# EAGLE board RFBoardLayoutGen0_v02.1 (EAGLE 7.2.0)
AUTHOR: Kirchschlager Raimund
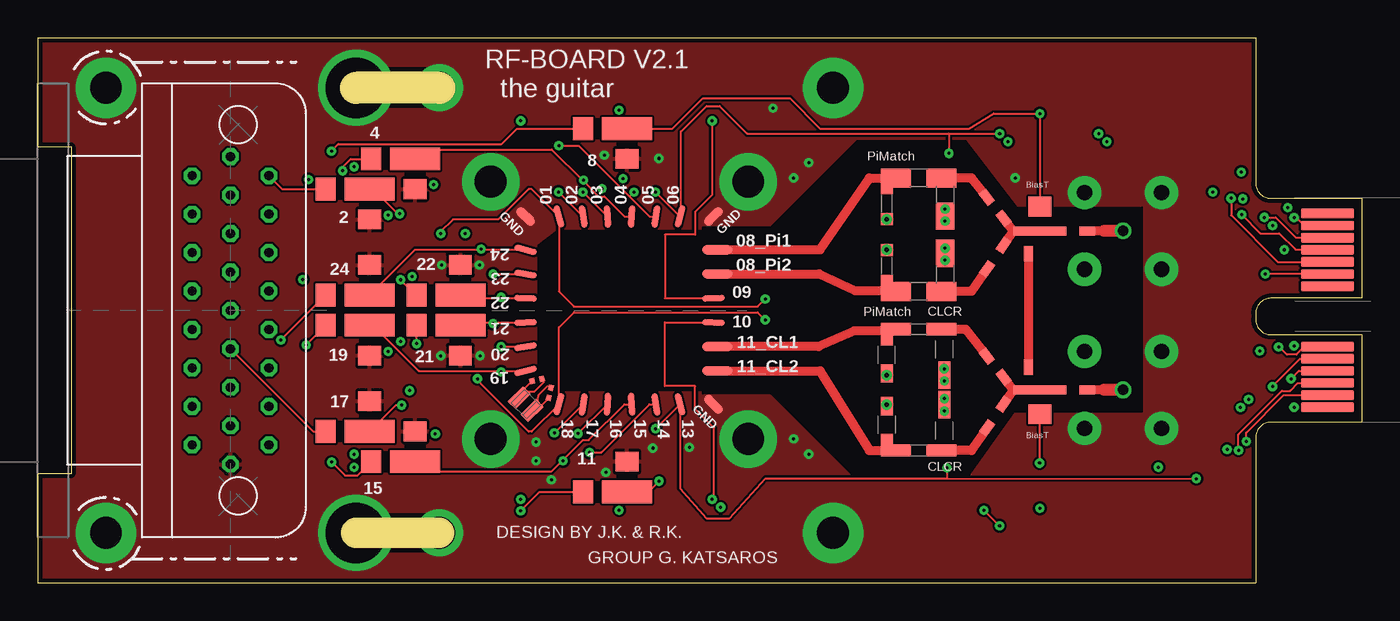
[diagram p0: board, top side]
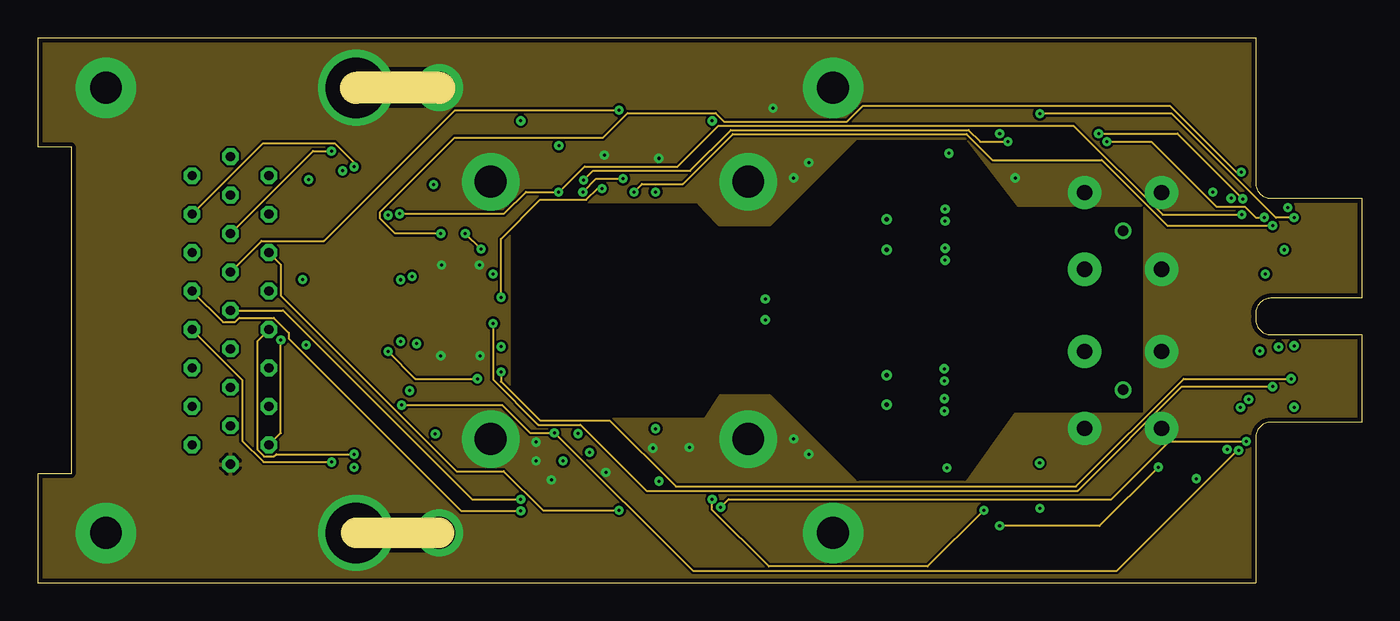
[diagram p1: board, inner layer Route2]
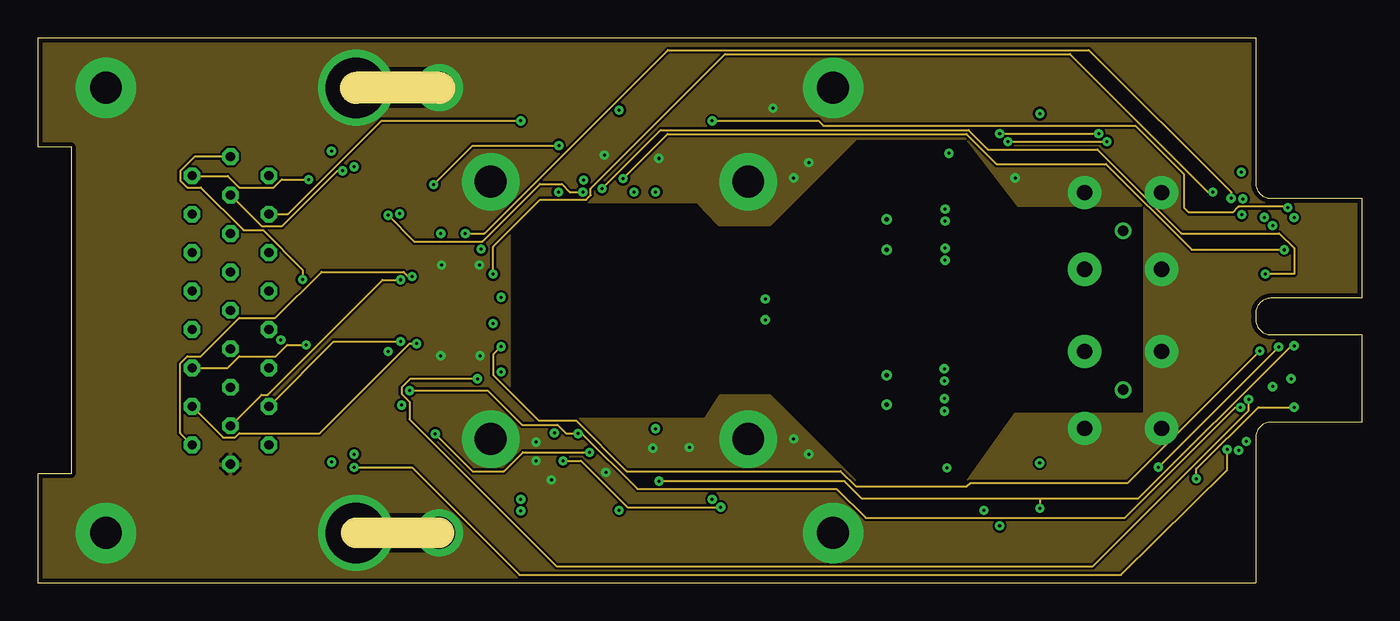
[diagram p2: board, inner layer Route15]
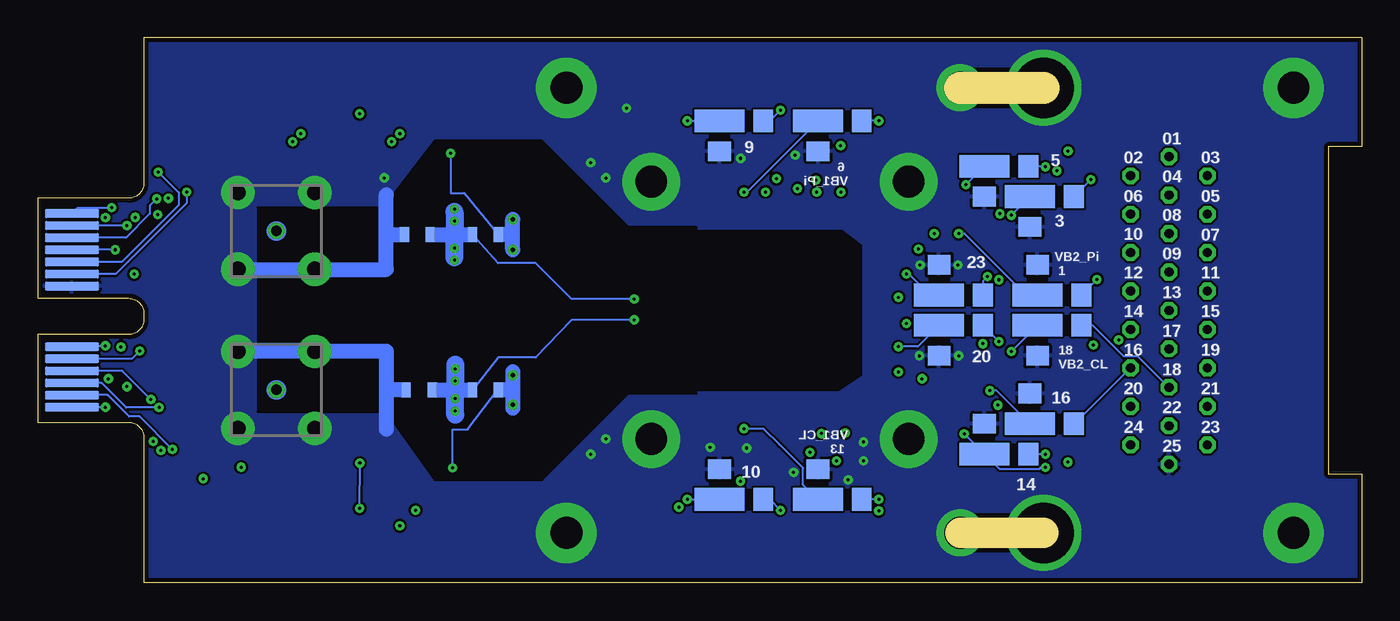
[diagram p3: board, bottom side, seen from below]

Size 87.4 x 36 mm. Coordinates in mm from the lower left corner, seen from the top.
Outline: 26.5,3.3 21,3.3
Outline: 26.5,32.7 21,32.7
Outline: 0,36 0,28.8 2.2,28.8 2.2,7.2 0,7.2 0,0 80.4,0 80.4,9.6 arc-90 81.4,10.6 87.4,10.6 87.4,16.4 81.4,16.4 arc-90 80.4,17.4 80.4,17.8 arc-90 81.4,18.8 87.4,18.8 87.4,25.4 81.4,25.4 arc-90 80.4,26.4 80.4,36 0,36
Copper layers (1+2*15+16): Top 0.035mm / dielectric 0.38mm / Route2 0.035mm / dielectric 0.71mm / Route15 0.035mm / dielectric 0.38mm / Bottom 0.035mm
Design rules "PCB-POOL HighSpec_ML4+ *": minimum track width 0.125mm, minimum drill 0.2mm, track to track 0.125mm, track to pad 0.125mm, pad to pad 0.125mm, via to via 0.125mm, smd to smd 0.125mm, copper to edge 0.3mm, drill to drill 0.2mm, minimum pad ring 10mil, minimum via ring 8mil, stop-mask expansion 0.075mm, vias tented up to drill 0.2mm, thermal gap 0.2mm
Net classes: 0 GND: clearance 0.15 mm; 1 RF: clearance 0.3 mm

## Footprints (pad centres in the part's own frame; a part is rotated, then mirrored left to right if it is on the bottom)
24DC+4RF/400MU-PADS/10.0X10.0_V1.2 = smd 0 x 0: BASE 0,0 | smd 1.5 x 0.6 rotated 315: P$1 -6.2,6.2; P$6 6.2,-6.2 | smd 1.5 x 0.4 rotated 267: P$2 0.8,6.2 | smd 1.5 x 0.6 rotated 45: P$3 6.2,6.2 | smd 1.5 x 0.4 rotated 93: P$4 0.8,-6.2; P$40 -0.8,6.2 | smd 0 x 0 rotated 45: P$5 -6.2,-6.2 | smd 1.5 x 0.4 rotated 345: P$26 -6.2,4 | smd 1.5 x 0.4 rotated 351: P$27 -6.2,2.4 | smd 1.5 x 0.4 rotated 357: P$28 -6.2,0.8; P$35 6.2,-0.8 | smd 1.5 x 0.4 rotated 3: P$29 -6.2,-0.8; P$34 6.2,0.8 | smd 1.5 x 0.4 rotated 9: P$30 -6.2,-2.4 | smd 1.5 x 0.4 rotated 15: P$31 -6.2,-4 | smd 2 x 0.6: P$32 6.45,4; P$33 6.45,2.4; P$36 6.45,-2.4; P$37 6.45,-4 | smd 1.5 x 0.4 rotated 105: P$38 -4,6.2; P$49 4,-6.2 | smd 1.5 x 0.4 rotated 99: P$39 -2.4,6.2; P$48 2.4,-6.2 | smd 1.5 x 0.4 rotated 81: P$42 2.4,6.2; P$45 -2.4,-6.2 | smd 1.5 x 0.4 rotated 75: P$43 4,6.2; P$44 -4,-6.2 | smd 1.5 x 0.4 rotated 87: P$46 -0.8,-6.2
25_SOCKET_M83513/13-D = drill 0.6 octagon: 01 10.16,0; 02 8.89,2.54; 03 6.35,2.54; 04 3.81,2.54; 05 2.54,0; 06 1.27,2.54; 07 0,0; 08 -1.27,2.54; 09 -2.54,0; 10 -3.81,2.54; 11 -6.35,2.54; 12 -8.89,2.54; 13 -10.16,0; 14 8.89,-2.54; 15 7.62,0; 16 6.35,-2.54; 17 5.08,0; 18 3.81,-2.54; 19 1.27,-2.54; 20 -1.27,-2.54; 21 -3.81,-2.54; 22 -5.08,0; 23 -6.35,-2.54; 24 -7.62,0; 25 -8.89,-2.54
MEC8-113-02-L-D-RA1 = smd 0.6 x 3.5: 129 -6.4,0.15; 130 -5.6,0.15; 131 -4.8,0.15; 132 -4,0.15; 133 -3.2,0.15; 134 -2.4,0.15; 135 -1.6,0.15; 136 2.4,0.15; 137 3.2,0.15; 138 4,0.15; 139 4.8,0.15; 140 5.6,0.15; 141 6.4,0.15 | smd 0.6 x 3.5 bottom: 157 -6.4,0.15; 158 -5.6,0.15; 159 -4.8,0.15; 160 -4,0.15; 161 -3.2,0.15; 162 -2.4,0.15; 163 -1.6,0.15; 168 2.4,0.15; 169 3.2,0.15; 170 4,0.15; 171 4.8,0.15; 172 5.6,0.15; 173 6.4,0.15
LP-FILTER/1_STAGE/OS/V1_01 = smd 1.3 x 1.5: $1 -2.9,0.01 | smd 3.3 x 1.5: $2 0,0.01 | smd 1.5 x 1.3: GND@1 0,-1.99
LP-FILTER/1_STAGE/OS/V1_02 = smd 3.3 x 1.5: $4 0,0.01 | smd 1.3 x 1.5: $6 -2.9,0.01 | smd 1.5 x 1.3: GND@3 0,2.01
PI_MATCH_V01_UP = smd 2 x 1.25: $1 0,0; $3 3,0 | smd 0.8 x 1.4: $2 -0.6,0.375 | smd 1.2 x 1.8: $4 3.25,2.525 | smd 0.8 x 0.8: GND@1 -0.6,2.725
CLCR_V01_DOWN = smd 2 x 0.8: $1 0,0; $3 3,0 | smd 0.8 x 1.4: $2 -0.6,-0.375 | smd 0.8 x 1.2: GND@1 -0.6,-2.925 | smd 0.8 x 1.8: GND@2 3.2,-3.025
LP-FILTER/1_STAGE/OS/V1_03 = smd 3.3 x 1.5 bottom: $4 0,0.01 | smd 1.3 x 1.5 bottom: $6 -2.9,0.01 | smd 1.5 x 1.3 bottom: GND@3 0,2.01
LP-FILTER/1_STAGE/OS/V1_04 = smd 1.3 x 1.5 bottom: $1 -2.9,0.01 | smd 3.3 x 1.5 bottom: $2 0,0.01 | smd 1.5 x 1.3 bottom: GND@1 0,-1.99
SMP_STRAIGHT_V02 = drill 1 pad 2.184: P$3 -2.54,2.54; P$4 2.54,2.54; P$5 2.54,-2.54; P$6 -2.54,-2.54
BIAS_TEE_UP_V01 = smd 1.5 x 1.3: P$1 0,-0.95 | smd 3.5 x 0.6: P$2 0,0.65
BIAS_TEE_DOWN_V01 = smd 1.5 x 1.3: P$1 0,0.95 | smd 3.5 x 0.6: P$2 0,-0.65
SMD1-0,6 = smd 1 x 0.6: 1 0,0
PI_MATCH_V01_DOWN = smd 2 x 1.25: $1 0,0; $3 3,0 | smd 0.8 x 1.4: $2 -0.6,-0.375 | smd 1.2 x 1.8: $4 3.25,-2.525 | smd 0.8 x 0.8: GND@1 -0.6,-2.725
CLCR_V01_UP = smd 2 x 0.8: $1 0,0; $3 3,0 | smd 0.8 x 1.4: $2 -0.6,0.375 | smd 0.8 x 1.2: GND@1 -0.6,2.925 | smd 0.8 x 1.8: GND@2 3.2,3.025
RX-BR_V1 = smd 1.422 x 0.711 rotated 45: P$2 -0.02,-0.87; P$3 -0.87,-0.02 | smd 0.406 x 0.406 rotated 165: P$5 1.23,0.63; P$8 1.08,-0.02 | smd 0.406 x 0.406 rotated 105: P$6 0.63,1.23; P$7 -0.02,1.08

## Placement (x,y rotation side)
E$1  [24DC+4RF/400MU-PADS/10.0X10.0_V1.2]  38.4,18 0 top
E$2  [25_SOCKET_M83513/13-D]  12.71,18 90 top
E$3  [MEC8-113-02-L-D-RA1]  85,18 270 top
E$4  [LP-FILTER/1_STAGE/OS/V1_01]  24.9,28 0 top
E$5  [LP-FILTER/1_STAGE/OS/V1_02]  24.9,8 0 top
E$6  [LP-FILTER/1_STAGE/OS/V1_01]  21.9,26 0 top
E$7  [LP-FILTER/1_STAGE/OS/V1_01]  21.9,17 0 top
E$8  [LP-FILTER/1_STAGE/OS/V1_02]  21.9,19 0 top
E$9  [PI_MATCH_V01_UP]  56.65,19.25 0 top
E$10  [CLCR_V01_DOWN]  56.65,16.75 0 top
E$11  [LP-FILTER/1_STAGE/OS/V1_02]  27.9,19 0 top
E$12  [LP-FILTER/1_STAGE/OS/V1_02]  21.9,10 0 top
E$13  [LP-FILTER/1_STAGE/OS/V1_02]  38.9,6 0 top
E$14  [LP-FILTER/1_STAGE/OS/V1_01]  38.9,30 0 top
E$15  [LP-FILTER/1_STAGE/OS/V1_01]  27.9,17 0 top
E$16  [LP-FILTER/1_STAGE/OS/V1_03]  21.4,19 0 top
E$17  [LP-FILTER/1_STAGE/OS/V1_03]  21.9,10.5 0 top
E$18  [LP-FILTER/1_STAGE/OS/V1_03]  24.9,8.5 0 top
E$19  [LP-FILTER/1_STAGE/OS/V1_03]  27.9,19 0 top
E$20  [LP-FILTER/1_STAGE/OS/V1_04]  24.9,27.5 0 top
E$21  [LP-FILTER/1_STAGE/OS/V1_04]  21.4,17 0 top
E$22  [LP-FILTER/1_STAGE/OS/V1_04]  27.9,17 0 top
E$23  [LP-FILTER/1_STAGE/OS/V1_04]  21.9,25.5 0 top
E$24  [LP-FILTER/1_STAGE/OS/V1_04]  35.9,30.5 0 top
E$25  [LP-FILTER/1_STAGE/OS/V1_04]  42.4,30.5 0 top
E$26  [SMP_STRAIGHT_V02]  71.65,23.25 0 top
E$27  [LP-FILTER/1_STAGE/OS/V1_03]  35.9,5.5 0 top
E$28  [LP-FILTER/1_STAGE/OS/V1_03]  42.4,5.5 0 top
E$29  [BIAS_TEE_UP_V01]  66.15,12.1 0 top
E$30  [BIAS_TEE_DOWN_V01]  66.15,23.9 0 top
E$31  [SMD1-0,6]  65.4,21.75 90 top
E$32  [PI_MATCH_V01_DOWN]  56.65,26.75 0 top
E$33  [SMP_STRAIGHT_V02]  71.65,12.75 0 top
E$34  [SMD1-0,6]  57,23 90 bottom
E$35  [SMD1-0,6]  65.4,14.25 90 top
E$36  [SMD1-0,6]  58.7,23 90 bottom
E$37  [CLCR_V01_UP]  56.65,8.75 0 top
E$38  [SMD1-0,6]  62.65,25.48 128 top
E$39  [SMD1-0,6]  63.75,24.07 128 top
E$40  [SMD1-0,6]  62.65,14.97 128 top
E$41  [SMD1-0,6]  63.75,13.57 128 top
E$42  [SMD1-0,6]  63.75,22.3 235.5 top
E$43  [SMD1-0,6]  62.67,20.74 235.5 top
E$44  [SMD1-0,6]  63.75,11.8 235.5 top
E$45  [SMD1-0,6]  62.67,10.24 235.5 top
E$46  [SMD1-0,6]  57,12.75 90 bottom
E$47  [SMD1-0,6]  58.7,12.75 90 bottom
E$48  [SMD1-0,6]  69.28,12.75 0 top
E$49  [SMD1-0,6]  61.5,23 90 bottom
E$50  [SMD1-0,6]  63.2,23 90 bottom
E$51  [SMD1-0,6]  61.38,12.75 90 bottom
E$52  [SMD1-0,6]  63.08,12.75 90 bottom
E$53  [RX-BR_V1]  32.65,12.25 0 top
E$54  [SMD1-0,6]  69.28,23.25 0 top

## Library data of the parts
E$1 = SampleArea
E$2 = Glenair
E$3 = MEC8-130-02-X-D-RA1
E$4-E$8 E$11-E$25 E$27 E$28 = LPFilter
E$9 E$10 E$32 E$37 = MatchCircuit
E$26 E$33 = RF Connectors
E$29 E$30 = Bias tee
E$31 E$34-E$36 E$38-E$52 E$54 = PADS
E$53 = TempSensors

## Nets
GND1: E$1.P$1 E$1.P$3 E$1.P$6 E$2.13 E$3.163 E$4.GND@1 E$5.GND@3 E$6.GND@1 E$7.GND@1 E$8.GND@3 E$11.GND@3 E$12.GND@3 E$13.GND@3 E$14.GND@1 E$15.GND@1 E$16.GND@3 E$17.GND@3 E$18.GND@3 E$19.GND@3 E$20.GND@1 E$21.GND@1 E$22.GND@1 E$23.GND@1 E$24.GND@1 E$25.GND@1 E$26.P$3 E$26.P$4 E$26.P$5 E$27.GND@3 E$28.GND@3 E$33.P$4 E$33.P$5 E$33.P$6
S$55: E$1.P$49 E$3.173 E$27.$4 E$46.1
S$67: E$2.24 E$11.$6
S$68: E$1.P$29 E$3.137 E$15.$2
S$76: E$2.11 E$15.$1
S$79: E$1.P$27 E$3.162 E$19.$4
S$80: E$2.12 E$19.$6
S$81: E$1.P$30 E$3.169 E$22.$2
S$83: E$2.23 E$22.$1
S$84: E$1.P$26 E$3.133 E$8.$4
S$85: E$2.25 E$8.$6
S$86: E$1.P$38 E$3.161 E$16.$4 E$36.1
S$88: E$2.01 E$16.$6
S$89: E$1.P$31 E$3.138 E$7.$2
S$90: E$2.10 E$7.$1
S$91: E$1.P$44 E$3.170 E$21.$2 E$47.1
S$95: E$2.22 E$21.$1
S$116: E$1.P$39 E$3.132 E$6.$2
S$144: E$2.14 E$6.$1
S$145: E$1.P$40 E$3.160 E$23.$2
S$146: E$2.02 E$23.$1
S$147: E$1.P$2 E$3.131 E$4.$2
S$149: E$2.15 E$4.$1
S$150: E$1.P$42 E$3.158 E$20.$2
S$151: E$2.03 E$20.$1
S$152: E$1.P$45 E$3.139 E$12.$4
S$154: E$2.09 E$12.$6
S$155: E$1.P$46 E$3.171 E$17.$4
S$156: E$2.21 E$17.$6
S$157: E$1.P$4 E$3.140 E$5.$4
S$158: E$2.08 E$5.$6
S$159: E$1.P$48 E$3.172 E$18.$4
S$160: E$2.20 E$18.$6
S$162: E$2.16 E$24.$1
S$168: E$2.17 E$14.$1
S$169: E$1.P$34 E$3.157 E$25.$2
S$170: E$2.05 E$25.$1
S$171: E$2.07 E$27.$6
S$174: E$1.P$28 E$3.134 E$11.$4
S$175: E$2.06 E$13.$6
S$177: E$1.P$35 E$3.136 E$28.$4
S$178: E$2.18 E$28.$6
S$183: E$3.168 E$13.$4 E$29.P$1
S$190: E$3.130 E$14.$2 E$30.P$1
S$199: E$30.P$2
S$211: E$1.P$43 E$3.159 E$24.$2 E$34.1

## Tracks (layer width: path | path; a pad name or v marks a point on that pad's centre or on a via)
GND1  (via drill 0.2, 2.1, 2.1 pad 3.8, 2.1 pad 4, 4)
  Bottom 1: 74.39,15.3 64.4,15.3 64.4,10.16 | 64.4,20.75 64.4,25.62 | 74.4,20.7 64.4,20.7
  other vias: 46.9,26.5 52.5,32.7 29.9,26.5 29.9,9.5 46.9,9.5 4.5,32.7 4.5,3.3 52.5,3.3 21,3.3 21,32.7 26.5,32.7 26.5,3.3 37.4,28.25 26.65,21 29.15,21 26.6,15 29.2,15 40.6,8.9 33.9,6.8 37.5,7.3 32.9,8.05 32.9,9.3 50.9,27.75 49.9,26.75 50.9,8.5 49.9,9.5 64.53,26.75 41,28.04 48.54,31.35 43.01,8.94
  pour Top (rank 6): -4.85,39.6 92.1,39.7 92.1,-4.7 -4.85,-4.8
  pour Route2 (rank 6): -7.5,41.1 92.6,41.6 92.6,-5.15 -7.5,-5.65
  pour Route15 (rank 6): -11.25,44.5 94.9,44.5 94.9,-11.4 -11.25,-11.4
  pour Bottom (rank 6): -16.65,49.3 97.15,49.2 97.15,-15.85 -16.65,-15.75
RF1  (via drill 0.7)
  other vias: 71.65,12.75
RF2
  Top 0.6: 70.4,23.25 69.28,23.25
  Top 0.8: 71.65,23.25 70.4,23.25
RF3  (via drill 0.7)
  other vias: 71.65,23.25
RF4
  Top 0.6: 70.4,12.75 69.28,12.75
  Top 0.8: 71.65,12.75 70.4,12.75
S$12  (via drill 0.2)
  other vias: 59.9,23.89
S$17
  Bottom 1.3: 71.62,23.25 71.67,23.25
S$55  (via drill 0.2)
  Top 0.125: v60.02,7.6 60.02,6.9 | 60.02,6.9 v76.48,6.88 | v40.78,10.18 E$1.P$49 | E$1.P$49 42.4,10.74 | E$1.P$49 42.4,6.25 44.15,4.25 45.65,4.25 48.05,6.9 60.02,6.9
  Route15 0.125: v82.94,11.6 80.59,11.6 76.48,7.53 v76.48,6.88
  Bottom 0.125: v82.94,11.6 E$3.173 | v60.02,7.6 60.02,10.12 59.02,10.12 56.9,12.9 E$46.1 | E$27.$4 36.88,6.48 36.88,7.58 38.43,9.13 | 38.44,9.12 38.43,9.13 | 38.43,9.13 39.48,10.18 v40.78,10.18
S$67  (via drill 0.2)
  Top 0.125: v23.94,20.02 24.94,19.02 E$11.$6
  Route15 0.125: v23.94,20.02 22.76,20.02 15.16,12.42 14.76,12.42 E$2.24
S$68  (via drill 0.2)
  Top 0.125: 30.06,17.2 28.08,17.2 E$15.$2 | 30.06,17.2 E$1.P$29 | E$3.137 83.32,14.8 81.52,13 v81.52,12.96 | v30.06,17.14 30.06,17.2
  Route2 0.125: v81.52,12.96 75.54,12.96 68.66,6.08 40.18,6.08 35.82,10.44 33.04,10.44 30.06,13.42 v30.06,17.14
S$76  (via drill 0.2)
  Top 0.125: v25,15.8 E$15.$1
  Route15 0.125: v25,15.8 24.54,15.8 18.62,9.88 13.3,9.88 13.02,9.6 12.22,9.6 E$2.11
S$79  (via drill 0.2)
  Top 0.125: v30.06,20.4 E$1.P$27
  Route15 0.125: v77.58,25.82 77.24,25.82 68.14,34.92 45.38,34.92 36.5,26.04 36.5,25.6 36.2,25.3 33.16,25.3 30.06,22.2 v30.06,20.4
  Bottom 0.125: v30.06,20.4 29.9,20.4 28.52,19.02 E$19.$4 | E$3.162 82.26,20.4 77.58,25.08 v77.58,25.82
S$80  (via drill 0.2)
  Route15 0.125: v24.7,20.24 24.46,20.24 24.16,20.54 18.72,20.54 15.68,17.5 13.3,17.5 10.76,14.96 9.86,14.96 9.4,14.5 9.4,9.88 10.16,9.12 E$2.12
  Bottom 0.125: E$19.$6 25,19.94 v24.7,20.24
S$81  (via drill 0.2)
  Top 0.125: v30.58,15.6 E$1.P$30
  Route15 0.125: v80.68,15.32 71.96,6.6 61.56,6.6 61.32,6.36 54.02,6.36 53,7.38 38.88,7.38 35.54,10.72 33.06,10.72 30.06,13.72 30.06,15.08 v30.58,15.6
  Bottom 0.125: v30.58,15.6 29.3,15.6 E$22.$2 | E$3.169 81.2,14.8 v80.68,15.32
S$82
  cutout Route15: 43.96,11.01 33.3,11.01 31.3,12.99 31.3,23.02 33.3,25 43.5,25 45.43,22.94 45.43,13.29
  cutout Bottom: 42.46,12.76 34.55,12.76 33.05,13.74 33.05,22.27 34.3,23.25 42.5,23.25 43.89,23.24 43.89,12.75
  cutout Top: 42.46,12.76 34.55,12.76 33.05,13.74 33.05,22.27 34.3,23.25 42.5,23.25 43.89,23.24 43.89,12.75
S$83  (via drill 0.2)
  Route15 0.125: v23.94,15.94 19.54,15.94 E$2.23
  Bottom 0.125: v23.94,15.94 E$22.$1
S$84  (via drill 0.2)
  Top 0.125: 29.26,22 24.9,22 E$8.$4 | 29.26,22 E$1.P$26 | E$3.133 81.86,21.2 78.78,24.28 v78.78,25.4 | v29.26,22.04 29.26,22
  Route2 0.125: v29.26,22.04 v28.22,23.08
  Route15 0.125: v78.78,25.4 78.78,25.8 69.38,35.2 41.6,35.2 29.48,23.08 v28.22,23.08
S$85  (via drill 0.2)
  Top 0.125: v16.04,16.04 E$8.$6
  Route2 0.125: v16.04,16.04 16.04,9.9 E$2.25
S$86  (via drill 0.2)
  Top 0.125: v26.6,23.08 26.6,23.2 27.4,24 30.4,24 32.4,26 32.6,26 E$1.P$38 34.4,19.25 35.4,18.25 47.52,18.25 v48.02,18.75
  Route2 0.125: v79.46,27.14 79.12,27.14 74.74,31.52 54.46,31.52 53.42,30.48 45.3,30.48 44.74,31.04 38.94,31.04 37.3,29.4 27.5,29.4 22.6,24.5 22.6,24.06 23.58,23.08 v26.6,23.08
  Bottom 0.125: v26.6,23.08 26.22,23.08 22.16,19.02 E$16.$4 | E$3.161 81.86,21.2 78.1,24.96 78.1,25.78 v79.46,27.14 | v48.02,18.75 52.15,18.75 54.52,21.12 57.02,21.12 E$36.1
S$88  (via drill 0.2)
  Route15 0.125: v17.48,20.04 17.48,20.68 14.86,23.3 13.58,23.3 10.76,26.12 9.86,26.12 9.4,26.58 9.4,27.2 10.36,28.16 E$2.01
  Bottom 0.125: v17.48,20.04 E$16.$6
S$89  (via drill 0.2)
  Top 0.125: 30.58,14 25.14,14 22.14,17 E$7.$2 | 30.58,14 E$1.P$31 | E$3.138 83.26,14 v82.74,13.48 | v30.58,13.94 30.58,14
  Route2 0.125: v82.74,13.48 75.66,13.48 68.54,6.36 42.12,6.36 37.76,10.72 33.16,10.72 30.58,13.3 v30.58,13.94
S$90  (via drill 0.2)
  Top 0.125: v17.72,15.72 E$7.$1
  Route15 0.125: v17.72,15.72 16.46,15.72 15.7,14.96 13.3,14.96 12.54,14.2 E$2.10
S$91  (via drill 0.2)
  Top 0.125: v29.02,13.48 29.02,13.38 32.4,10 32.6,10 E$1.P$44 34.4,16.88 35.4,17.88 47.52,17.88 v48.02,17.38
  Route2 0.125: v29.02,13.48 24.92,13.48 v23.12,15.28
  Route15 0.125: v79.94,12.12 79.94,11.38 69.64,1.08 34.26,1.08 24.54,10.8 24.54,11.96 24.02,12.48 24.02,12.92 24.58,13.48 v29.02,13.48
  Bottom 0.125: v23.12,15.28 E$21.$2 | E$3.170 81.82,14 v79.94,12.12 | v48.02,17.38 52.15,17.38 54.52,14.88 57.02,14.88 E$47.1
S$95
  Bottom 0.125: E$21.$1 17.74,17 15.7,14.96 14.76,14.96 E$2.22
S$116  (via drill 0.2)
  Top 0.125: v34.38,25.82 E$1.P$39 | v23.88,24.38 23.76,24.38 22.14,26 E$6.$2 | E$3.132 83.04,22 81.96,23.08 80.72,23.08 v79.48,24.32
  Route2 0.125: v23.88,24.38 30.78,24.38 32.22,25.82 v34.38,25.82 34.44,25.84 36.1,27.5 42.24,27.5 44.94,30.2 68.38,30.2 74.26,24.32 v79.48,24.32
S$144
  Top 0.125: E$6.$1 16.12,26.02 E$2.14
S$145  (via drill 0.2)
  Top 0.125: v35.98,25.82 E$1.P$40
  Route2 0.125: v38.64,26.7 36.86,26.7 v35.98,25.82
  Route15 0.125: v35.98,25.82 35.12,25.82 34.6,26.34 33.14,26.34 29.36,22.56 24.84,22.56 v23.12,24.28 | v82.3,22 76.18,22 70.52,27.66 63.3,27.66 61.32,29.64 41.58,29.64 v38.64,26.7
  Bottom 0.125: v23.12,24.28 E$23.$2 | v82.3,22 E$3.160
S$146  (via drill 0.2)
  Route15 0.125: v17.88,26.64 16.1,26.64 15.58,26.12 13.3,26.12 12.54,26.88 E$2.02
  Bottom 0.125: v17.88,26.64 E$23.$1
S$147  (via drill 0.2)
  Top 0.125: E$1.P$2 38.72,24.2 37.4,25.52 37.02,25.52 35.98,26.56 | 35.98,26.56 33.92,28.62 25.5,28.62 E$4.$2 | E$3.131 83.06,22.8 81.72,24.14 v80.98,24.14 | v36.02,26.6 35.98,26.56
  Route2 0.125: v80.98,24.14 80.4,24.14 79.7,24.84 77.82,24.84 73.52,29.14 v70.58,29.14 | v64.04,29.14 62.22,29.14 61.44,29.92 45.76,29.92 43.06,27.22 36.64,27.22 v36.02,26.6
  Route15 0.125: v64.04,29.14 v70.58,29.14
S$149  (via drill 0.2)
  Top 0.125: v20.12,27.22 20.12,27.46 20.66,28 E$4.$1
  Route15 0.125: v20.12,27.22 19.78,27.22 16.14,23.58 14.76,23.58 E$2.15
S$150  (via drill 0.2)
  Top 0.125: E$1.P$42 40.38,24.2 39.06,25.52 | 39.06,25.52 35.7,28.88 v34.4,28.88 | 39.06,25.52 v39.36,25.82
  Route2 0.125: v81.52,23.6 74.58,23.6 70.24,27.94 63.02,27.94 61.32,29.64 45.88,29.64 42.58,26.34 39.88,26.34 v39.36,25.82
  Route15 0.125: v34.4,28.88 28.7,28.88 v26.12,26.3
  Bottom 0.125: v26.12,26.3 E$20.$2 | v81.52,23.6 E$3.158
S$151  (via drill 0.2)
  Route2 0.125: v20.88,27.48 20.88,27.76 19.6,29.04 14.86,29.04 E$2.03
  Bottom 0.125: v20.88,27.48 20.9,27.5 E$20.$1
S$152  (via drill 0.2)
  Top 0.125: v34.1,9.9 E$1.P$45 | v24.02,11.74 23.64,11.74 E$12.$4 | E$3.139 83.2,13.2 82.68,12.68 82.14,12.68 79.26,9.8 79.26,8.78 v79.28,8.76
  Route2 0.125: v24.02,11.74 30.66,11.74 32.5,9.9 v34.1,9.9 34.16,9.88 43.24,0.8 71.24,0.8 79.2,8.76 v79.28,8.76
S$154
  Top 0.125: E$12.$6 18.16,10.02 E$2.09
S$155  (via drill 0.2)
  Top 0.125: v35.66,9.86 E$1.P$46
  Route15 0.125: v24.54,12.7 29.7,12.7 31.96,10.44 34.3,10.44 34.88,9.86 v35.66,9.86 35.72,9.84 35.94,9.84 39.58,6.2 52.74,6.2 54.66,4.28 71.76,4.28 79.06,11.58 v79.4,11.58
  Bottom 0.125: v24.54,12.7 24.1,12.7 E$17.$4 | E$3.171 83.2,13.2 81.58,11.58 v79.4,11.58
S$156
  Bottom 0.125: E$17.$6 18.92,10.52 E$2.21
S$157  (via drill 0.2)
  Top 0.125: E$1.P$4 38.72,11.8 36.36,9.44 35.98,9.44 34.64,8.1 | 34.64,8.1 33.92,7.38 25.52,7.38 E$5.$4 | E$3.140 82.26,12.4 79.78,9.92 v79.78,9.34 | v34.68,8.06 34.64,8.1
  Route2 0.125: v79.78,9.34 74.7,9.34 70.88,5.52 45.6,5.52 v45.08,5
  Route15 0.125: v45.08,5 38.92,5 35.86,8.06 v34.68,8.06
S$158  (via drill 0.2)
  Top 0.125: v19.4,7.98 20.28,7.1 21.1,7.1 E$5.$6
  Route2 0.125: v19.4,7.98 14.9,7.98 13.5,9.38 13.5,13.4 E$2.08
S$159  (via drill 0.2)
  Top 0.125: E$1.P$48 40.38,11.8 37.2,8.62 v36.42,8.62
  Route15 0.125: v36.42,8.62 32.02,8.62 30.78,7.38 28.7,7.38 v26.24,9.84 | v78.52,8.82 78.53,7.47 71.5,0.52 31.8,0.52 24.7,7.62 v20.88,7.62
  Bottom 0.125: v26.24,9.84 E$18.$4 24.84,8.48 23.9,7.54 21.26,7.54 21.18,7.62 v20.88,7.62 | E$3.172 82.8,12.4 81.38,10.98 80.68,10.98 v78.52,8.82
S$160  (via drill 0.2)
  Route2 0.125: v20.88,8.5 15.74,8.5 15.58,8.34 14.94,8.34 14.48,8.8 14.48,15.96 15.24,16.72 E$2.20
  Bottom 0.125: v20.88,8.5 E$18.$6
S$161
  Bottom 1.2: 59.9,21.5 59.9,22.9
S$162  (via drill 0.2)
  Route15 0.125: v31.88,30.52 22.68,30.52 16.52,24.36 E$2.16
  Bottom 0.125: v31.88,30.52 E$24.$1
S$163  (via drill 0.2)
  other vias: 59.85,13.34
S$164
  Bottom 1.2: 59.85,14.4 59.85,12.98
S$165
  cutout Route2: 43.96,11.01 33.3,11.01 31.3,12.99 31.3,23.02 33.3,25 43.5,25 45.43,22.94 45.43,13.29
S$166  (via drill 0.2)
  other vias: 59.9,22.11
S$167
  Bottom 1: 56.05,22 56.05,24
S$168  (via drill 0.2)
  Top 0.125: v19.38,28.52 19.84,28.98 30.62,28.98 31.64,30 E$14.$1
  Route2 0.125: v19.38,28.52 18.16,28.52 E$2.17
S$169  (via drill 0.2)
  Top 0.125: v44.52,30.52 44.52,25.62 43.4,24.5 43.4,23 41.4,23 41.4,18.8 E$1.P$34
  Route15 0.125: v82.52,24.78 82.46,24.84 79.26,24.84 78.88,24.46 75.98,24.46 75.68,24.76 75.68,26.98 72.46,30.2 51.86,30.2 51.54,30.52 v44.52,30.52
  Bottom 0.125: v44.52,30.52 E$25.$2 | v82.52,24.78 84.76,24.78 E$3.157
S$170  (via drill 0.2)
  Route2 0.125: v38.38,31.22 27.54,31.22 18.9,22.58 14.76,22.58 E$2.05
  Bottom 0.125: v38.38,31.22 39.08,30.52 E$25.$1
S$171  (via drill 0.2)
  Route2 0.125: v31.88,5.52 28.66,5.52 16.18,18 E$2.07
  Bottom 0.125: v31.88,5.52 E$27.$6
S$172
  Bottom 1: 56.1,23 56.8,23
S$173
  Bottom 1: 61.25,23 58.9,23
S$174  (via drill 0.2)
  Top 0.125: 30.58,18.8 28.1,18.8 E$11.$4 | 30.58,18.8 E$1.P$28 | v30.58,18.86 30.58,18.8 | E$3.134 v81.04,20.4
  Route2 0.125: v37.24,26.04 36.94,26.04 36.2,25.3 33.16,25.3 30.58,22.72 v30.58,18.86
  Route15 0.125: v37.24,26.04 41.12,29.92 61.44,29.92 62.74,28.62 69.96,28.62 75.5,23.08 81.96,23.08 82.94,22.1 82.94,20.4 v81.04,20.4
S$175  (via drill 0.2)
  Top 0.125: v31.88,4.76 33.12,6 E$13.$6
  Route2 0.125: v31.88,4.76 27.94,4.76 16.56,16.14 16.56,16.52 15.58,17.5 13.3,17.5 13.02,17.22 12.22,17.22 E$2.06
S$176
  Top 0.6: 44.65,22 51.65,22 54.9,26.75 56.4,26.75
S$177  (via drill 0.2)
  Top 0.125: v63.5,3.76 v62.46,4.8 | v81.92,15.58 81.96,15.58 82.46,15.08 83.1,15.08 83.62,15.6 E$3.136 | v44.52,5.52 44.65,5.65 44.65,10.25 43.4,11.5 43.4,13 41.4,13 41.4,17.2 E$1.P$35
  Route2 0.125: v44.52,5.52 44.52,4.82 48.26,1.08 58.74,1.08 v62.46,4.8 | v63.5,3.76 70.1,3.76 v73.98,7.64
  Route15 0.125: v81.92,15.58 v73.98,7.64
  Bottom 0.125: v44.52,5.52 E$28.$4
S$178  (via drill 0.2)
  Route2 0.125: v38.38,4.8 33.34,4.8 30.76,7.38 27.64,7.38 16.04,18.98 16.04,21.02 E$2.18
  Bottom 0.125: v38.38,4.8 39.08,5.5 E$28.$6
S$180
  Top 0.6: 44.65,20.4 51.6,20.4 53.95,19.3 56.6,19.3
S$181
  cutout Top: 43.9,23.5 48.4,23.5 54.1,29.2 61.2,29.2 64.6,24.8 72.9,24.8 72.9,11.3 64.4,11.3 61.2,6.8 54.2,6.8 54.1,6.8 48.4,12.5 43.9,12.5
  cutout Route2: 43.9,23.5 48.4,23.5 54.1,29.2 61.2,29.2 64.6,24.8 72.9,24.8 72.9,11.3 64.4,11.3 61.2,6.8 54.2,6.8 54.1,6.8 48.4,12.5 43.9,12.5
  cutout Route15: 43.9,23.5 48.4,23.5 54.1,29.2 61.2,29.2 64.6,24.8 72.9,24.8 72.9,11.3 64.4,11.3 61.2,6.8 54.2,6.8 54.1,6.8 48.4,12.5 43.9,12.5
  cutout Bottom: 43.9,23.5 48.4,23.5 54.1,29.2 61.2,29.2 64.6,24.8 72.9,24.8 72.9,11.3 64.4,11.3 61.2,6.8 54.2,6.8 54.1,6.8 48.4,12.5 43.9,12.5
S$183  (via drill 0.2)
  Top 0.125: v41.02,6.72 40.32,6.02 E$13.$4 | v66.14,7.91 E$29.P$1
  Route15 0.125: v41.02,6.72 53.26,6.72 54.42,5.56 66.15,5.56 | v82.94,15.66 82.74,15.66 72.64,5.56 66.15,5.56 | 66.15,5.56 v66.15,4.93
  Bottom 0.125: v82.94,15.66 85.08,15.66 E$3.168 | v66.15,4.93 v66.14,7.91
S$186
  Bottom 1.3: 71.62,12.75 71.67,12.75
S$187
  Top 0.6: 51.65,14 54.9,8.75 56.9,8.75
S$188
  Top 0.6: 56.65,16.65 53.9,16.65 51.55,15.6 44.65,15.6
S$189
  Top 0.6: 66.65,12.75 64.4,12.75
S$190  (via drill 0.2)
  Top 0.125: E$14.$2 41.91,30.01 43.9,32 49.65,32 51.65,30 61.46,30 63.1,31 v66.16,31 E$30.P$1 | E$3.130 83.62,23.6 83.1,24.12 v82.94,24.12
  Route2 0.125: v82.94,24.12 81.74,24.12 74.86,31 v66.16,31
S$191  (via drill 0.3)
  other vias: 56.05,24.02
S$192
  Bottom 1: 63.27,12.75 64.28,12.75
S$193
  Bottom 1: 56.05,13.95 56.05,11.53
S$194
  Bottom 1.2: 59.9,24.5 59.9,23.2
S$195
  Top 0.6: 65.4,21.75 65.4,14.25
S$196  (via drill 0.3)
  other vias: 56.05,13.72
S$197
  Top 0.6: 59.4,26.75 61.65,26.75 62.75,25.35
S$198
  Top 0.6: 59.65,19.25 61.65,19.25 62.75,20.85
S$199
  Top 0.6: E$30.P$2 64.4,23.25 63.65,24.2
S$200
  Top 0.6: 59.4,16.75 61.27,16.74 62.75,14.85
S$201
  Top 0.6: 65.9,12.75 64.4,12.75 63.65,13.7
S$202
  Top 0.6: 63.68,22.2 64.4,23.25
S$203
  Top 0.6: 61.65,8.75 59.65,8.75
S$204
  Top 0.6: 61.65,8.75 62.75,10.35
S$205
  Top 0.6: 63.68,11.7 64.4,12.75
S$206
  Top 0.6: 44.67,14 51.65,14
S$207
  Bottom 1: 61.12,12.75 58.9,12.75
S$208  (via drill 0.2)
  other vias: 59.9,24.7
S$209
  Bottom 1.2: 59.85,11.1 59.85,12.6
S$210  (via drill 0.3)
  other vias: 56.05,22
S$211  (via drill 0.2)
  Top 0.125: 60.15,29.68 v63.5,29.68 | 60.15,29.68 46.83,29.68 45.01,31.5 44.15,31.5 42.46,29.81 42.46,24.22 E$1.P$43 v40.78,25.82 | 60.15,29.68 v60.15,28.38
  Route2 0.125: v79.56,25.36 75.24,29.68 v70.04,29.68
  Route15 0.125: v63.5,29.68 v70.04,29.68
  Bottom 0.125: E$3.159 81.58,22.8 80,24.38 80,24.92 v79.56,25.36 | v60.15,28.38 60.15,25.75 59.27,25.75 E$34.1 | E$24.$2 40.58,25.82 v40.78,25.82
S$212  (via drill 0.2)
  other vias: 59.9,21.31
S$213  (via drill 0.3)
  other vias: 56.05,11.77
S$214  (via drill 0.2)
  other vias: 59.85,11.34
S$215  (via drill 0.2)
  other vias: 59.84,14.14
S$216  (via drill 0.2)
  other vias: 59.85,12.17
S$217
  Top 0.125: 33.77,12.25 33.02,11.5
S$218
  Bottom 1: 56.1,12.75 56.8,12.75
S$219
  Top 0.125: 32.9,11.5 33.02,12.38 33.65,13 33.9,12.88
S$220
  Bottom 1: 64.15,23 63.52,23
S$221
  Top 0.125: 32.52,13.25 31.9,12.62
S$222
  Top 0.125: 32.15,12.62 32.77,12.62 33.4,13.25 33.27,13.5

## Text on the board
tPlace: RF-BOARD V2.1 / the guitar | 4 | 8 | 2 | 22 | 24 | 19 | 21 | 17 | 11 | 15 | DESIGN BY J.K. & R.K. | GROUP G. KATSAROS
bPlace: 01 | 03 | 02 | 5 | 9 | 04 | 05 | 06 | 6 / VB1_Pi | 08 | 3 | 07 | 10 | 09 | 11 | 12 | 23 | 13 | VB2_Pi / 1 | 15 | 14 | 17 | 19 | 16 | 20 | 18 | 18 / VB2_CL | 21 | 20 | 22 | 16 | 23 | 24 | 25 | VB1_CL / 13 | 10 | 14